# EAGLE board Panel (EAGLE 9.6.2)

Size 100 x 80 mm. Coordinates in mm from the lower left corner, seen from the top.
Outline: 0,0 100,0 100,80 0,80 0,0
Copper layers (1*16): Top 0.035mm / dielectric 1.5mm / Bottom 0.035mm
Design rules "default": minimum track width 6mil, minimum drill 0.35mm, track to track 6mil, track to pad 6mil, pad to pad 6mil, via to via 6mil, smd to smd 6mil, copper to edge 40mil, drill to drill 6mil, minimum pad ring 10mil, minimum via ring 8mil, stop-mask expansion 4mil, vias tented up to drill 0mil, thermal gap 10mil

## Footprints (pad centres in the part's own frame; a part is rotated, then mirrored left to right if it is on the bottom)
LED-1206 = smd 1.2 x 1.4: A -1.5,0; C 1.5,0
POWER_JACK_PTH_LOCK = drill 2.997 pad 4.115: GND 0.025,6.557; GNDBREAK 3.762,10.7 | drill 3.2 pad 4.115: PWR 0,13.878
1X04 = drill 1.016 pad 1.88: 1 0,0; 2 2.54,0; 3 5.08,0; 4 7.62,0
JS202011CQN = drill 0.9: 1 0,0; 2 2.5,0; 3 5,0; 4 0,3.3; 5 2.5,3.3; 6 5,3.3

## Placement (x,y rotation side)
D1  BLUE  [LED-1206]  2.54,-10.16 0 top  (outside the outline)
D2  GREEN  [LED-1206]  2.54,-13.97 0 top  (outside the outline)
D3  RED  [LED-1206]  2.54,-17.78 0 top  (outside the outline)
D4  RED  [LED-1206]  2.54,-21.59 0 top  (outside the outline)
D5  Yellow  [LED-1206]  2.54,-25.4 0 top  (outside the outline)
J1  POWER_JACKPTH_LOCK  [POWER_JACK_PTH_LOCK]  -8.89,-26.67 0 top  (outside the outline)
J2  [1X04]  -11.43,-30.48 0 top  (outside the outline)
J3  [1X04]  -11.43,-34.29 0 top  (outside the outline)
J4  [1X04]  -11.43,-38.1 0 top  (outside the outline)
J5  [1X04]  -11.43,-41.91 0 top  (outside the outline)
S1  JS202011CQN  [JS202011CQN]  33.02,20.32 0 top
S2  JS202011CQN  [JS202011CQN]  44.45,20.32 0 top
S3  JS202011CQN  [JS202011CQN]  2.54,-5.08 0 top

## Library data of the parts
D1 = SparkFun-LED; PROD_ID: DIO-09911
D2 = SparkFun-LED; PROD_ID: DIO-00862
D3 D4 = SparkFun-LED; PROD_ID: DIO-09912
D5 = SparkFun-LED; PROD_ID: DIO-09909
J1 = SparkFun-Connectors; PROD_ID: CONN-08197; SF_ID: PRT-00119
J2-J5 = SparkFun-Connectors
S1-S3 = switches; DIGIKEY: 401-2001-ND; MANUFACTURER: C&K; MPN: JS202011CQN

## Nets
1: J2.1 J3.1 J4.1 J5.1
2: J2.2 J3.2 J4.2 J5.2

## Tracks (layer width: path | path; a pad name or v marks a point on that pad's centre or on a via)
1  (3 unrouted)
2  (3 unrouted)